# EAGLE board Patrick (EAGLE 9.6.0)
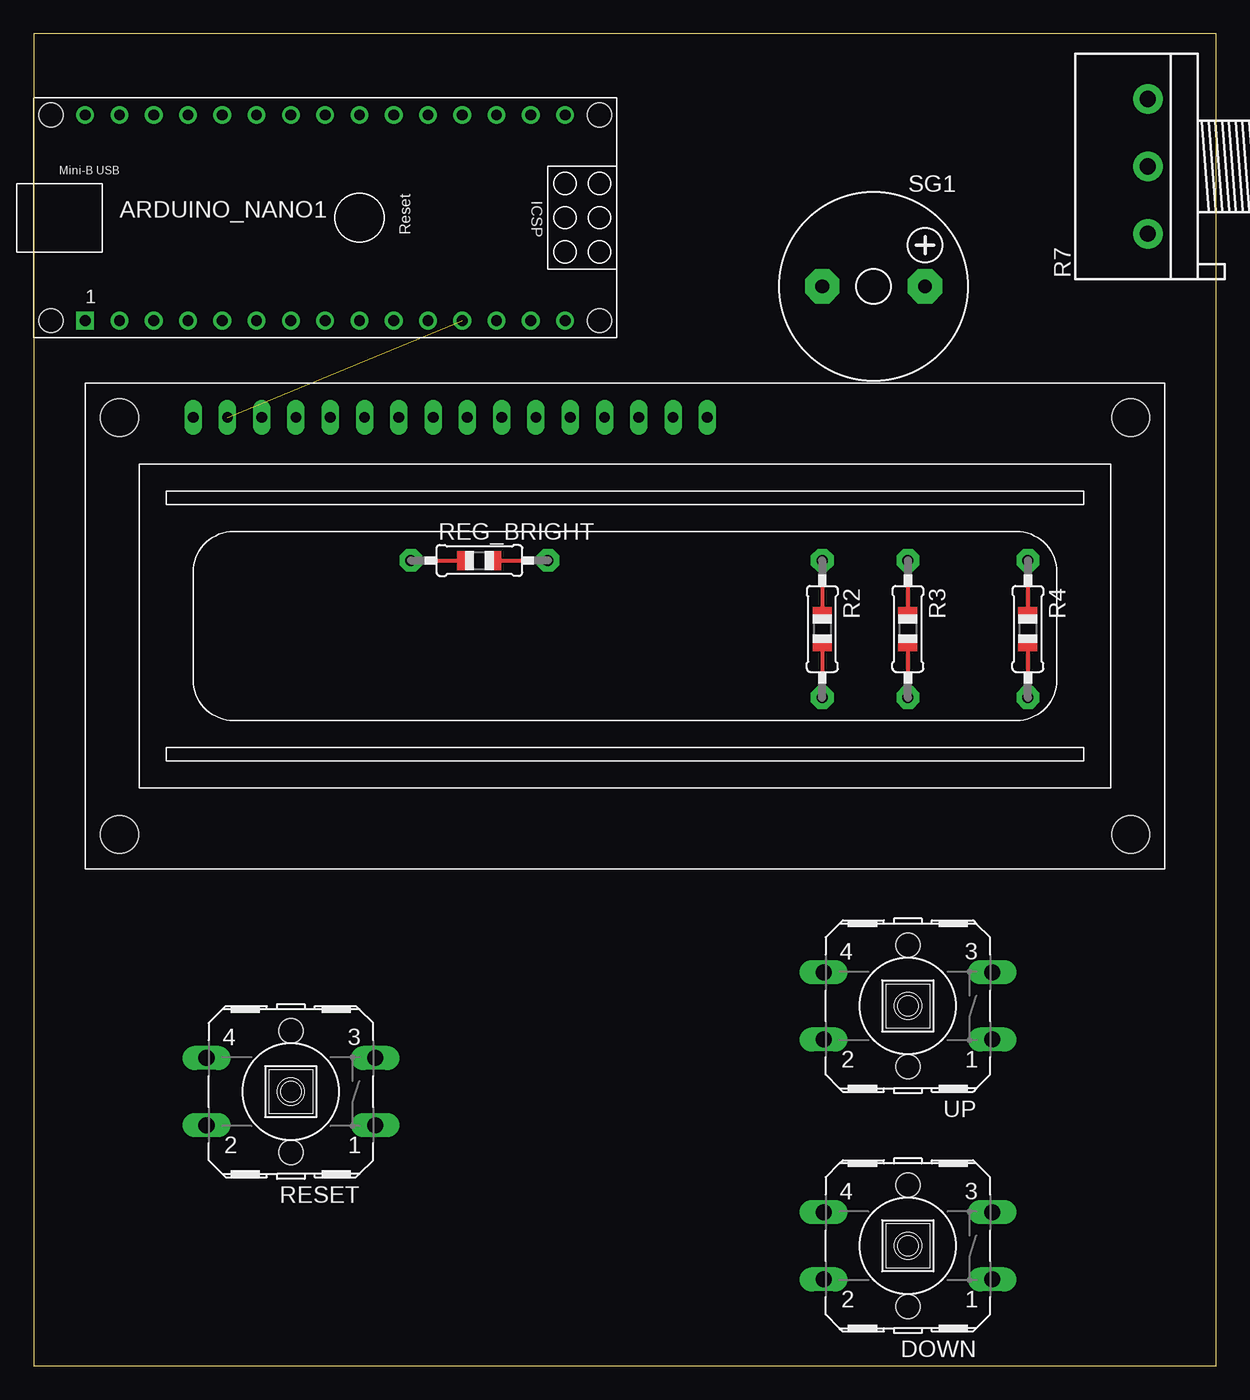
[diagram p0: board, top side]
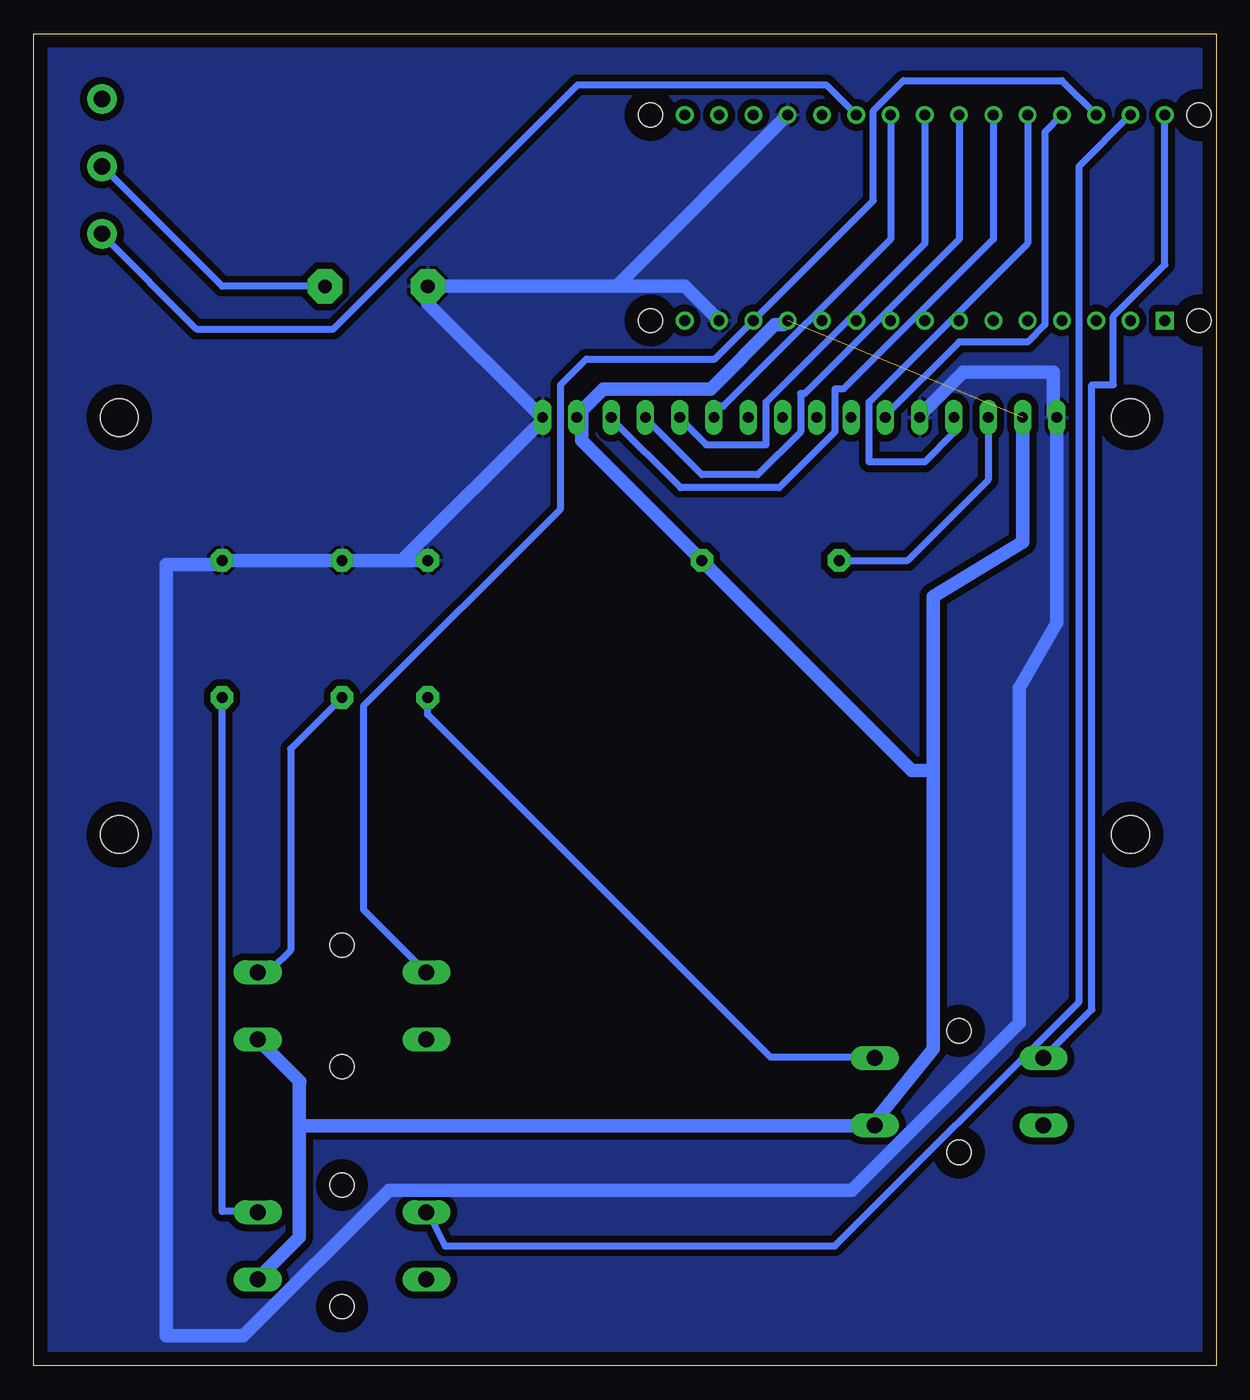
[diagram p1: board, bottom side, seen from below]

Size 87.61 x 98.73 mm. Coordinates in mm from the lower left corner, seen from the top.
Outline: 0,0 87.61,0 87.61,98.73 0,98.73 0,0
Copper layers (1*16): Top 0.035mm / dielectric 1.5mm / Bottom 0.035mm
Design rules "default": minimum track width 6mil, minimum drill 0.35mm, track to track 6mil, track to pad 6mil, pad to pad 6mil, via to via 6mil, smd to smd 6mil, copper to edge 40mil, drill to drill 6mil, minimum pad ring 10mil, minimum via ring 8mil, stop-mask expansion 4mil, vias tented up to drill 0mil, thermal gap 10mil
Net classes: 0 default: width 0.508 mm; 1 Alimentacao: width 1.016 mm

## Footprints (pad centres in the part's own frame; a part is rotated, then mirrored left to right if it is on the bottom)
ARDUINO_NANO = drill 0.8 square: 1 -20.32,-7.62 | drill 0.8: 2 -17.78,-7.62; 3 -15.24,-7.62; 4 -12.7,-7.62; 5 -10.16,-7.62; 6 -7.62,-7.62; 7 -5.08,-7.62; 8 -2.54,-7.62; 9 0,-7.62; 10 2.54,-7.62; 11 5.08,-7.62; 12 7.62,-7.62; 13 10.16,-7.62; 14 12.7,-7.62; 15 15.24,-7.62; 16 15.24,7.62; 17 12.7,7.62; 18 10.16,7.62; 19 7.62,7.62; 20 5.08,7.62; 21 2.54,7.62; 22 0,7.62; 23 -2.54,7.62; 24 -5.08,7.62; 25 -7.62,7.62; 26 -10.16,7.62; 27 -12.7,7.62; 28 -15.24,7.62; 29 -17.78,7.62; 30 -20.32,7.62 | hole 1.778: -22.86,-7.62; -22.86,7.62; 17.78,7.62; 17.78,-7.62
B3F-40XX = drill 1.194 long: 1 -6.248,2.489; 2 6.248,2.489; 3 -6.248,-2.489; 4 6.248,-2.489 | hole 1.803: 0,-4.496; 0,4.496
0805-THM = drill 0.813 pad 1.676 octagon: 1 -5.08,0; 2 5.08,0
3RP/1610N = drill 1.2 pad 2.184: 1 -5,0; 2 0,0; 3 5,0
F/CM12P = drill 1.016 pad 2.54 octagon: + 3.81,0; - -3.81,0
LCD1602 = drill 0.8 long: 1 8,33.46; 2 10.54,33.46; 3 13.08,33.46; 4 15.62,33.46; 5 18.16,33.46; 6 20.7,33.46; 7 23.24,33.46; 8 25.78,33.46; 9 28.32,33.46; 10 30.86,33.46; 11 33.4,33.46; 12 35.94,33.46; 13 38.48,33.46; 14 41.02,33.46; 15 43.56,33.46; 16 46.1,33.46 | hole 2.8: 2.54,2.54; 2.54,33.46; 77.46,33.46; 77.46,2.54

## Placement (x,y rotation side)
ARDUINO_NANO1  [ARDUINO_NANO]  24.13,85.09 0 top
DOWN  [B3F-40XX]  64.77,8.89 180 top
R2  [0805-THM]  58.42,54.61 270 top
R3  [0805-THM]  64.77,54.61 270 top
R4  [0805-THM]  73.66,54.61 270 top
R7  [3RP/1610N]  82.55,88.9 90 top
REG_BRIGHT  [0805-THM]  33.02,59.69 0 top
RESET  [B3F-40XX]  19.05,20.32 180 top
SG1  F/CM12P  [F/CM12P]  62.23,80.01 0 top
UP  [B3F-40XX]  64.77,26.67 180 top
X1  HD44780LCD-1602  [LCD1602]  3.81,36.83 0 top

## Library data of the parts
ARDUINO_NANO1 = ArduinoNanoV30
DOWN RESET UP = switch-omron; MF: OMRON COMPONENTS USA; MPN: B3F-4000; OC_FARNELL: 176434; OC_NEWARK: 36K3105
R2-R4 REG_BRIGHT X1 = adafruit
R7 = pot
SG1 = buzzer; OC_FARNELL: unknown; OC_NEWARK: unknown

## Nets
GND [Alimentacao]: ARDUINO_NANO1.14 ARDUINO_NANO1.19 R2.1 R3.1 R4.1 SG1.- X1.1 X1.5 X1.16
N$1: REG_BRIGHT.1 X1.3
N$2: ARDUINO_NANO1.28 UP.4
N$3: ARDUINO_NANO1.29 DOWN.4
N$4: R3.2 UP.3
N$5: DOWN.3 R4.2
N$6: R2.2 RESET.3
N$7: ARDUINO_NANO1.30 RESET.4
N$8: ARDUINO_NANO1.27 X1.6
N$9: ARDUINO_NANO1.26 X1.4
N$10: ARDUINO_NANO1.25 X1.14
N$11: ARDUINO_NANO1.24 X1.13
N$12: ARDUINO_NANO1.23 X1.12
N$13: ARDUINO_NANO1.22 X1.11
N$15: ARDUINO_NANO1.21 R7.1
N$16: R7.2 SG1.+
VCC [Alimentacao]: ARDUINO_NANO1.12 DOWN.1 REG_BRIGHT.2 RESET.1 UP.1 X1.2 X1.15
VIN: ARDUINO_NANO1.15

## Tracks (layer width: path | path; a pad name or v marks a point on that pad's centre or on a via)
GND
  Bottom 1.016: ARDUINO_NANO1.14 39.37,80.01 44.13,80.01 | 44.13,80.01 SG1.- 58.42,78.74 50.16,70.48 X1.16 50.16,69.85 60.01,60.01 60.01,59.69 | ARDUINO_NANO1.19 44.13,80.33 44.13,80.01 | X1.5 21.91,70.48 18.73,73.66 12.06,73.66 12.06,70.48 X1.1 11.81,55.05 14.61,50.23 14.61,25.4 26.99,13.02 61.28,13.02 72.07,2.22 77.79,2.22 77.79,59.37 73.98,59.37 R4.1 R3.1 60.01,59.69 | 60.01,59.69 R2.1
  pour Bottom (isolate 0.508): 0,99.06 86.36,99.06 87.63,97.79 87.63,0 0,0
N$1
  Bottom 0.508: REG_BRIGHT.1 22.86,59.69 16.89,65.66 X1.3
N$2
  Bottom 0.508: ARDUINO_NANO1.28 11.43,95.25 23.18,95.25 25.4,93.03 25.4,86.36 37.15,74.61 46.67,74.61 48.58,72.71 48.58,63.5 63.18,48.9 63.18,33.82 UP.4
N$3
  Bottom 0.508: ARDUINO_NANO1.29 10.16,88.9 10.16,26.99 28.26,8.89 57.15,8.89 58.27,11.12 DOWN.4
N$4
  Bottom 0.508: R3.2 68.58,45.72 68.58,30.8 69.97,29.41 UP.3
N$5
  Bottom 0.508: R4.2 73.66,11.43 71.12,11.43 DOWN.3
N$6
  Bottom 0.508: R2.2 58.42,48.26 33.02,22.86 25.4,22.86 RESET.3
N$7
  Bottom 0.508: ARDUINO_NANO1.30 3.81,81.6 7.62,77.79 7.62,72.71 9.21,72.71 9.21,26.4 RESET.4
N$8
  Bottom 0.508: ARDUINO_NANO1.27 12.7,91.44 12.7,77.15 13.97,75.88 19.05,75.88 24.45,70.48 X1.6
N$9
  Bottom 0.508: ARDUINO_NANO1.26 13.97,83.19 25.72,71.44 25.72,66.99 21.59,66.99 19.43,69.15 X1.4
N$10
  Bottom 0.508: ARDUINO_NANO1.25 16.51,83.5 27.62,72.39 28.26,72.39 28.26,69.22 32.38,65.09 39.69,65.09 44.77,70.17 X1.14
N$11
  Bottom 0.508: ARDUINO_NANO1.24 19.05,83.5 30.48,72.07 30.8,72.07 30.8,69.22 33.97,66.04 38.1,66.04 42.23,70.17 X1.13
N$12
  Bottom 0.508: ARDUINO_NANO1.23 21.59,83.19 33.34,71.44 33.34,68.26 37.78,68.26 39.69,70.17 X1.12
N$13
  Bottom 0.508: ARDUINO_NANO1.22 24.13,83.5 36.51,71.12 37.15,71.12 37.15,70.48 X1.11
N$15
  Bottom 0.508: ARDUINO_NANO1.21 28.89,94.93 47.31,94.93 65.41,76.83 75.56,76.83 82.55,83.82 R7.1
N$16
  Bottom 0.508: R7.2 73.66,80.01 SG1.+
VCC  (1 unrouted)
  Bottom 1.016: ARDUINO_NANO1.12 32.07,77.15 32.7,77.15 37.47,72.39 45.4,72.39 47.31,70.48 X1.15 47.35,70.13 46.99,70.48 46.99,68.58 REG_BRIGHT.2 22.54,44.13 21.27,44.13 | 67.94,17.78 67.94,20.92 67.91,21.07 UP.1 | 67.94,17.78 67.94,9.53 70.8,6.67 DOWN.1 | X1.2 14.35,61.06 20.95,57.03 20.95,23.5 25.3,18.13 RESET.1 25.72,17.78 67.94,17.78